# EAGLE board LaserScanner-Panel (EAGLE 9.1.3)
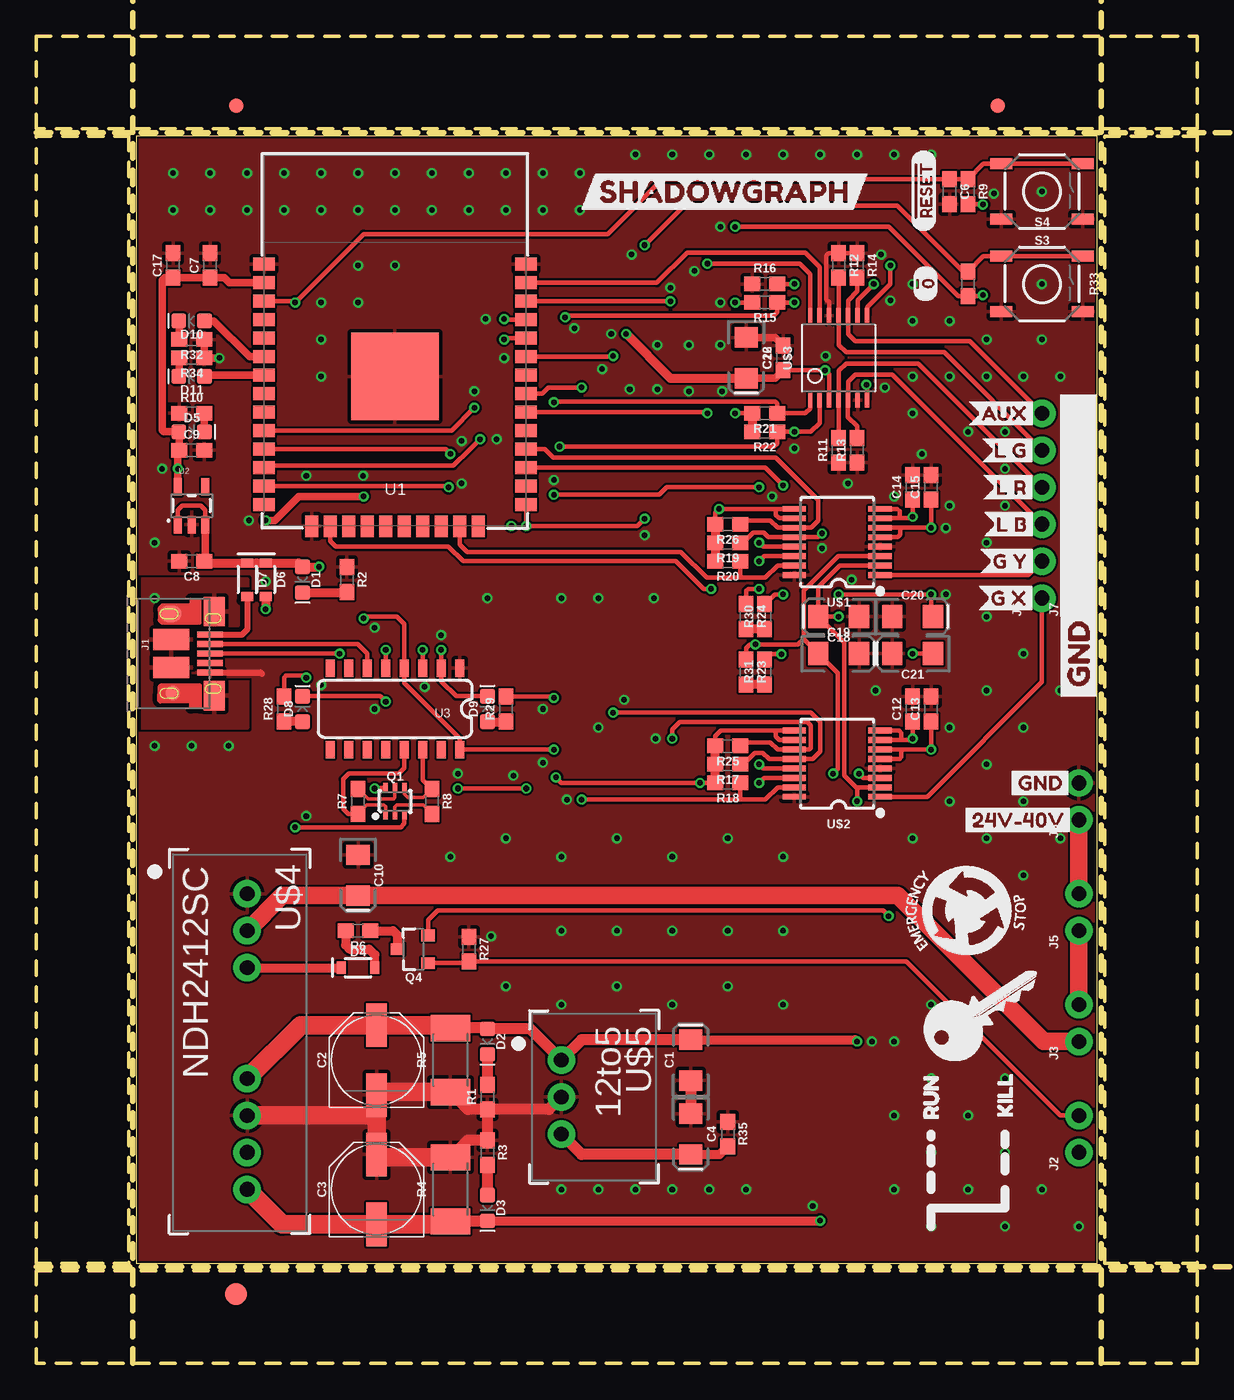
[diagram p0: board, top side]
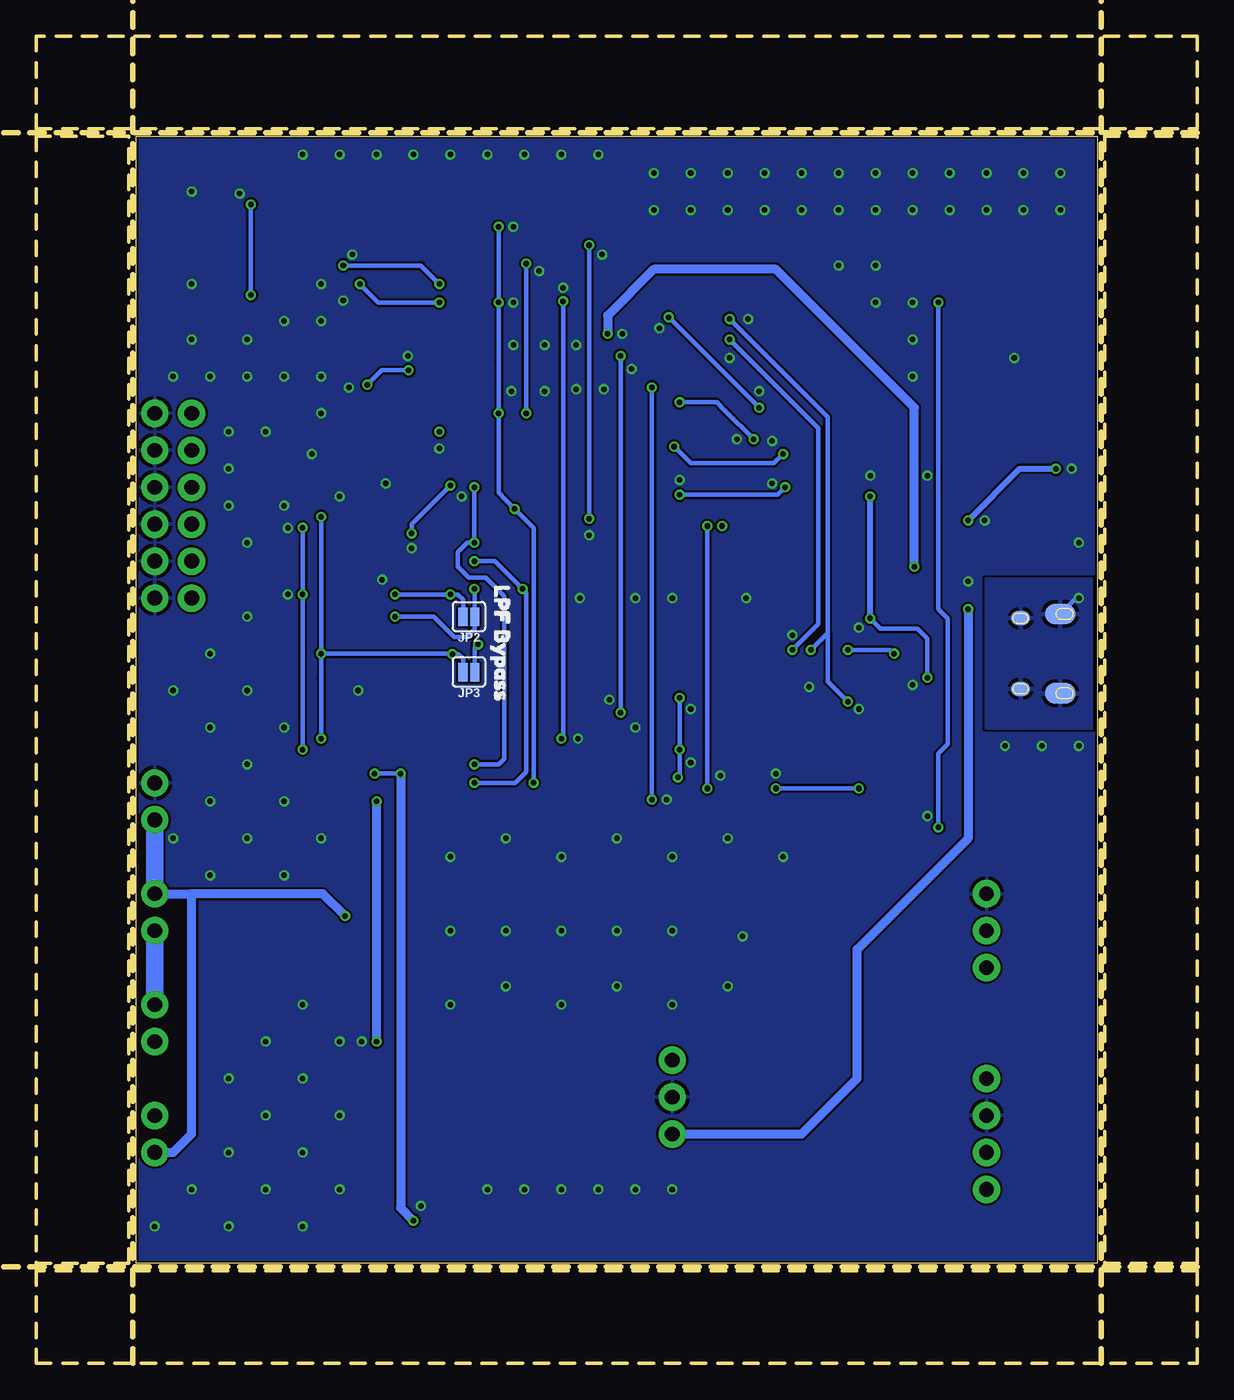
[diagram p1: board, bottom side, seen from below]

Size 79.76 x 91.19 mm. Coordinates in mm from the lower left corner, seen from the top.
Outline: 6.86,6.86 72.88,6.86 72.9,84.33 6.86,84.33 6.86,6.86
Outline: 0,6.35 79.76,6.35 79.76,0 0,0 0,6.35
Outline: 73.41,84.33 79.76,84.33 79.76,6.86 73.41,6.86 73.41,84.33
Outline: 0,91.19 79.76,91.19 79.76,84.84 0,84.84 0,91.19
Outline: 0,84.33 6.35,84.33 6.35,6.86 0,6.86 0,84.33
Copper layers (1*16): Top 0.035mm / dielectric 1.5mm / Bottom 0.035mm
Design rules "SparkFun-2-layer-PCBWay-LIMIT": minimum track width 6mil, minimum drill 0.3mm, track to track 6mil, track to pad 6mil, pad to pad 6mil, via to via 6mil, smd to smd 6mil, copper to edge 6mil, drill to drill 6mil, minimum pad ring 6mil, minimum via ring 6mil, stop-mask expansion 4mil, vias tented up to drill 25mil, thermal gap 10mil
Milling: 206 lines

## Footprints (pad centres in the part's own frame; a part is rotated, then mirrored left to right if it is on the bottom)
EIA3216 = smd 1.4 x 1.6: + 1.4,0; - -1.4,0
PANASONIC_D = smd 3 x 1.4: + 2.4,0; - -2.4,0
0603 = smd 1.1 x 1: 1 -0.85,0; 2 0.85,0
LED-0603 = smd 1 x 1: A -0.877,0; C 0.877,0
SOD-323 = smd 0.63 x 0.83: A 1.15,0; C -1.15,0
FIDUCIAL-1X2 = smd 1 x 1: 1 0,0
FIDUCIAL-1.5X3 = smd 1.5 x 1.5: 1 0,0
USB-MICROB-PTH-MILL = smd 0.4 x 1.75: D+ 0,0; D- -0.65,0; GND 1.3,0; ID 0.65,0; VBUS -1.3,0 | smd 2 x 1.46: SHIELD -2.9,0.275; SHIELD2 2.9,0.275 | smd 1.425 x 2.5: SHIELD3 -0.963,-2.675; SHIELD4 0.963,-2.675 | smd 1.4 x 2.1 bottom: SHIELD5 -2.731,-2.531; SHIELD7 2.729,-2.531 | smd 1 x 1: SHIELD6 2.7,-2.575 | smd 1.1 x 1.5: SHIELD8 -2.731,-2.731 | smd 1 x 1.3 bottom: SHIELD9 -2.43,0.195; SHIELD10 2.43,0.195
1X02_NO_SILK = drill 1.016 pad 1.88: 1 0,0; 2 2.54,0
1X06_NO_SILK = drill 1.016 pad 1.88: 1 0,0; 2 2.54,0; 3 5.08,0; 4 7.62,0; 5 10.16,0; 6 12.7,0
SMT-JUMPER_2_NO_SILK = smd 0.635 x 1.27: 1 -0.406,0; 2 0.406,0
SC70-6 = smd 0.3 x 0.66: 1 -0.65,-0.92; 2 0,-0.92; 3 0.65,-0.92; 4 0.65,0.92; 5 0,0.92; 6 -0.65,0.92
SOT23-3 = smd 0.8 x 0.9: 1 -0.95,-1; 2 0.95,-1; 3 0,1.1
2010 = smd 1.8 x 2.7: 1 -2.2,0; 2 2.2,0
TACTILE_SWITCH_SMD_5.2MM = smd 1.524 x 0.762: 1 -2.794,1.905; 2 2.794,1.905; 3 -2.794,-1.905; 4 2.794,-1.905
ESP-WROOM-32 = smd 0.9 x 1.5: 1 7.7,9; 2 6.43,9; 3 5.16,9; 4 3.89,9; 5 2.62,9; 6 1.35,9; 7 0.08,9; 8 -1.19,9; 9 -2.46,9; 10 -3.73,9; 11 -5,9; 12 -6.27,9; 13 -7.54,9; 14 -8.81,9; 25 -8.81,-9; 26 -7.54,-9; 27 -6.27,-9; 28 -5,-9; 29 -3.73,-9; 30 -2.46,-9; 31 -1.19,-9; 32 0.08,-9; 33 1.35,-9; 34 2.62,-9; 35 3.89,-9; 36 5.16,-9; 37 6.43,-9; 38 7.7,-9 | smd 1.5 x 0.9: 15 -10.3,5.715; 16 -10.3,4.445; 17 -10.3,3.175; 18 -10.3,1.905; 19 -10.3,0.635; 20 -10.3,-0.635; 21 -10.3,-1.905; 22 -10.3,-3.175; 23 -10.3,-4.445; 24 -10.3,-5.715 | smd 6 x 6: GND 0,0
SOT23-5 = smd 0.55 x 1.2: 1 -0.95,-1.3; 2 0,-1.3; 3 0.95,-1.3; 4 0.95,1.3; 5 -0.95,1.3
SO016 = smd 0.6 x 1.2: 1 -4.445,-2.8; 2 -3.175,-2.8; 3 -1.905,-2.8; 4 -0.635,-2.8; 5 0.635,-2.8; 6 1.905,-2.8; 7 3.175,-2.8; 8 4.445,-2.8; 9 4.445,2.8; 10 3.175,2.8; 11 1.905,2.8; 12 0.635,2.8; 13 -0.635,2.8; 14 -1.905,2.8; 15 -3.175,2.8; 16 -4.445,2.8
TSSOP16 = smd 0.4 x 1.6: 1 -2.225,-2.85; 2 -1.575,-2.85; 3 -0.925,-2.85; 4 -0.275,-2.85; 5 0.375,-2.85; 6 1.025,-2.85; 7 1.675,-2.85; 8 2.325,-2.85; 9 2.325,3.05; 10 1.675,3.05; 11 1.025,3.05; 12 0.375,3.05; 13 -0.275,3.05; 14 -0.925,3.05; 15 -1.575,3.05; 16 -2.225,3.05
TSSOP14 = smd 0.305 x 0.991: 1 -1.95,-2.918; 2 -1.3,-2.918; 3 -0.65,-2.918; 4 0,-2.918; 5 0.65,-2.918; 6 1.3,-2.918; 7 1.95,-2.918; 8 1.95,2.918; 9 1.3,2.918; 10 0.65,2.918; 11 0,2.918; 12 -0.65,2.918; 13 -1.3,2.918; 14 -1.95,2.918
NDH = drill 1.016 pad 1.88: 1 0,0; 2 2.54,0; 3 5.08,0; 6 12.7,0; 7 15.24,0; 8 17.78,0; 9 20.32,0
RE-78E = drill 1.016 pad 1.88: 1 0,0; 2 2.54,0; 3 5.08,0

## Placement (x,y rotation side)
C1  10uF  [EIA3216]  44.96,20.83 90 top
C2  [PANASONIC_D]  23.37,20.83 90 top
C3  [PANASONIC_D]  23.37,11.94 90 top
C4  10uF  [EIA3216]  44.96,15.75 270 top
C6  0.1uF  [0603]  62.74,80.52 270 top
C7  0.1uF  [0603]  11.94,75.44 90 top
C8  1.0uF  [0603]  10.67,55.12 180 top
C9  1.0uF  [0603]  10.67,62.74 0 top
C10  10uF  [EIA3216]  22.1,33.53 270 top
C12  1.0uF  [0603]  60.2,44.96 90 top
C13  1.0uF  [0603]  61.47,44.96 90 top
C14  1.0uF  [0603]  60.2,60.2 90 top
C15  1.0uF  [0603]  61.47,60.2 90 top
C16  1.0uF  [0603]  51.31,69.09 90 top
C17  1.0uF  [0603]  9.4,75.44 90 top
C18  10uF  [EIA3216]  55.12,51.31 180 top
C19  10uF  [EIA3216]  55.12,48.77 0 top
C20  10uF  [EIA3216]  60.2,51.31 0 top
C21  10uF  [EIA3216]  60.2,48.77 180 top
C22  10uF  [EIA3216]  48.77,69.09 270 top
D1  RED  [LED-0603]  18.29,53.85 270 top
D2  BLUE  [LED-0603]  30.99,22.1 270 top
D3  BLUE  [LED-0603]  30.99,10.67 270 top
D4  3A/10V/280mV  [SOD-323]  22.1,27.18 0 top
D5  RED  [LED-0603]  10.67,64.01 0 top
D6  3A/10V/280mV  [SOD-323]  15.75,53.85 270 top
D7  3A/10V/280mV  [SOD-323]  14.48,53.85 270 top
D8  GREEN  [LED-0603]  18.29,44.96 90 top
D9  Yellow  [LED-0603]  30.99,44.96 90 top
D10  BLUE  [LED-0603]  10.67,71.63 180 top
D11  BLUE  [LED-0603]  10.67,67.82 180 top
E$1  [FIDUCIAL-1X2]  13.72,86.42 0 top
E$2  [FIDUCIAL-1X2]  66.04,86.42 0 top
E$3  [FIDUCIAL-1.5X3]  13.72,4.76 0 top
J1  USB  [USB-MICROB-PTH-MILL]  11.94,48.77 270 top
J2  !KILL!  [1X02_NO_SILK]  71.63,14.48 90 top
J3  KEYSWITCH  [1X02_NO_SILK]  71.63,22.1 90 top
J5  ESTOP  [1X02_NO_SILK]  71.63,29.72 90 top
J6  [1X06_NO_SILK]  69.09,52.58 90 top
J7  [1X06_NO_SILK]  71.63,52.58 90 top
J8  Power Input  [1X02_NO_SILK]  71.63,37.34 90 top
JP2  JUMPER-SMT_2_NO_SILK  [SMT-JUMPER_2_NO_SILK]  50.04,51.31 180 bottom
JP3  JUMPER-SMT_2_NO_SILK  [SMT-JUMPER_2_NO_SILK]  50.04,47.5 180 bottom
Q1  MBT3904DW1T1  [SC70-6]  24.64,38.61 0 top
Q4  2.5A/30V/105mΩ  [SOT23-3]  25.91,28.45 90 top
R1  1k  [0603]  30.99,18.29 90 top
R2  1k  [0603]  21.34,53.85 270 top
R3  1k  [0603]  30.99,14.48 270 top
R4  510  [2010]  28.45,11.94 90 top
R5  510  [2010]  28.45,20.83 90 top
R6  3.3k  [0603]  22.1,29.72 180 top
R7  10k  [0603]  22.1,38.61 90 top
R8  10k  [0603]  27.18,38.61 270 top
R9  10k  [0603]  64.01,80.52 270 top
R10  1k  [0603]  10.67,65.28 0 top
R11  10k  [0603]  55.12,62.74 90 top
R12  10k  [0603]  55.12,75.44 270 top
R13  10k  [0603]  56.39,62.74 90 top
R14  10k  [0603]  56.39,75.44 270 top
R15  10k  [0603]  50.04,72.9 180 top
R16  10k  [0603]  50.04,74.17 0 top
R17  10k  [0603]  47.5,41.15 180 top
R18  10k  [0603]  47.5,39.88 180 top
R19  10k  [0603]  47.5,56.39 180 top
R20  10k  [0603]  47.5,55.12 180 top
R21  10k  [0603]  50.04,65.28 180 top
R22  10k  [0603]  50.04,64.01 180 top
R23  10k  [0603]  48.77,47.5 270 top
R24  10k  [0603]  48.77,51.31 270 top
R25  10k  [0603]  47.5,42.42 180 top
R26  10k  [0603]  47.5,57.66 180 top
R27  10k  [0603]  29.72,28.45 270 top
R28  1k  [0603]  17.02,44.96 90 top
R29  1k  [0603]  32.26,44.96 90 top
R30  10k  [0603]  50.04,51.31 90 top
R31  10k  [0603]  50.04,47.5 90 top
R32  1k  [0603]  10.67,70.36 180 top
R33  10k  [0603]  64.01,74.17 270 top
R34  1k  [0603]  10.67,69.09 180 top
R35  100  [0603]  47.5,15.75 270 top
S3  USW2  [TACTILE_SWITCH_SMD_5.2MM]  69.09,74.17 0 top
S4  USW3  [TACTILE_SWITCH_SMD_5.2MM]  69.09,80.52 0 top
U1  ESP-WROOM-32  [ESP-WROOM-32]  24.64,67.82 90 top
U2  3.3V  [SOT23-5]  10.67,58.93 0 top
U3  CH340C  [SO016]  24.64,44.96 180 top
U$1  DAC8871SBPW  [TSSOP16]  55.12,56.39 90 top
U$2  DAC8871SBPW  [TSSOP16]  55.12,41.15 90 top
U$3  DAC80004IPW  [TSSOP14]  55.12,69.09 0 top
U$4  NDH2412SC  [NDH]  14.48,32.26 270 top
U$5  12to5  [RE-78E]  36.07,20.83 270 top
U$6  [KEY#PNG]  64.86,23.86 0 top
U$7  [E#STOP#JPG]  63.86,30.86 90 top
U$8  [24V#40V3]  63.37,37.34 0 top
U$9  [GND0]  71.6,45.11 90 top
U$10  [GND1]  66.55,39.88 0 top
U$11  [KILL11]  66.55,16 90 top
U$12  [RUN10]  61.47,15.88 90 top
U$13  [#RESET14]  60.96,77.6 90 top
U$14  [#013]  61.09,72.77 90 top
U$15  [AUX4]  64.01,65.28 0 top
U$16  [G_X14]  64.64,52.58 0 top
U$17  [G_Y13]  64.77,55.12 0 top
U$18  [L_B12]  65.02,57.66 0 top
U$19  [LPF_BYPASS12]  47.75,54.36 270 bottom
U$20  [L_R14]  65.02,60.2 0 top
U$21  [L_G10]  64.9,62.74 0 top
U$22  [SHADOWGRAPH15]  37.34,80.52 0 top

## Library data of the parts
C1 C4 C10 C18-C22 = SparkFun-Capacitors; PROD_ID: CAP-00811
C2 C3 = SparkFun-Capacitors
C6 = SparkFun-Capacitors; PROD_ID: CAP-00810
C7 = SparkFun-Capacitors; PROD_ID: CAP-08604
C8 C9 = SparkFun-Capacitors; PROD_ID: CAP-00868
C12-C17 = SparkFun-Capacitors; PROD_ID: CAP-13930
D1 D5 = SparkFun-LED; PROD_ID: DIO-00819
D2 D3 D10 D11 = SparkFun-LED; PROD_ID: DIO-08575
D4 D6 D7 = SparkFun-DiscreteSemi; PROD_ID: DIO-14072
D8 = SparkFun-LED; PROD_ID: DIO-00821
D9 = SparkFun-LED; PROD_ID: DIO-09003
E$1 E$2 = SparkFun-Aesthetics
E$3 = SparkFun-Retired
J1 = SparkFun-Connectors; PROD_ID: CONN-13711
J2 J3 J5 J8 = SparkFun-Connectors
J6 J7 = SparkFun-Connectors; PROD_ID: CONN-08437
JP2 JP3 = SparkFun-Jumpers
Q1 = SparkFun-DiscreteSemi; PROD_ID: TRANS-13337
Q4 = SparkFun-DiscreteSemi; PROD_ID: TRANS-11308
R1-R3 R10 R28 R29 R32 R34 = SparkFun-Resistors; PROD_ID: RES-07856
R4 R5 = SparkFun-Resistors; PROD_ID: RES-08717
R6 = SparkFun-Resistors; PROD_ID: RES-07851
R7-R9 R11-R27 R30 R31 R33 = SparkFun-Resistors; PROD_ID: RES-00824
R35 = SparkFun-Resistors; PROD_ID: RES-12438
S3 S4 = SparkFun-Switches; PROD_ID: SWCH-08247; SF_SKU: COM-08720
U1 = SparkFun-RF; PROD_ID: IC-13849
U2 = SparkFun-IC-Power; PROD_ID: VREG-12457
U3 = SparkFun-IC-Comms; PROD_ID: IC-14038
U$1-U$5 = laserscanner
U$6 = key#png
U$7 = e#stop#jpg
U$8-U$22 = buzzard_labels

## Nets
0: Q1.6 R33.1 S3.1 S3.2 U1.25
3.3V: C7.1 C9.1 C17.1 D5.A R9.2 R15.2 R17.2 R18.2 R19.2 R20.2 R21.2 R22.2 R25.2 R26.2 R28.2 R29.2 R33.2 U1.2 U2.5 U3.4 U3.16 U$1.9 U$1.10 U$2.9 U$2.10
5V: C8.1 C16.1 C22.+ D1.A D6.C D7.C U2.1 U2.3 U$3.3 U$3.7
12V: C1.+ C2.+ C18.+ D2.A JP2.1 R5.2 R24.1 U$1.2 U$2.2 U$4.6 U$5.1
!DTR: Q1.1 R7.1 U3.13
!KILL: J2.2 Q4.1 R27.2
!RTS: Q1.4 R8.1 U3.14
-12V: C3.- C19.- D3.C JP3.1 R4.1 R23.1 U$1.3 U$2.3 U$4.9
AUX_OUT: J6.6 R14.2 U$3.10
D+: J1.D+ U3.5
D-: J1.D- U3.6
G_MOSI: U1.16 U$1.14 U$2.14
G_SCLK: U1.13 U$1.13 U$2.13
GND: C1.- C2.- C3.+ C4.- C6.2 C7.2 C8.2 C9.2 C10.- C12.2 C13.2 C14.2 C15.2 C16.2 C17.2 C18.- C19.+ C20.- C21.+ C22.- J1.GND J7.1 J7.2 J7.3 J7.4 J7.5 J7.6 J8.2 R1.1 R2.1 R3.1 R4.2 R5.1 R10.1 R11.1 R12.1 R13.1 R14.1 R16.1 R27.1 R32.1 R34.1 R35.1 S3.3 S3.4 S4.3 S4.4 U1.1 U1.15 U1.38 U1.GND U2.2 U3.1 U$1.4 U$1.16 U$2.4 U$2.16 U$3.6 U$3.12 U$4.1 U$4.7 U$5.2
GX_!CS: R17.1 U1.33 U$2.12
GX_!LDAC: R18.1 U1.31 U$2.15
GX_!RST: R25.1 U1.36 U$2.11
GX_OUT: J6.1 U$2.1
GY_!CS: R19.1 U1.27 U$1.12
GY_!LDAC: R20.1 U1.23 U$1.15
GY_!RST: R26.1 U1.28 U$1.11
GY_OUT: J6.2 U$1.1
L_!CLR: R15.1 U1.10 U$3.9
L_!LDAC: R21.1 U1.12 U$3.1
L_!SYNC: R22.1 U1.11 U$3.2
L_MOSI: U1.37 U$3.13
L_SCLK: U1.30 U$3.14
LASER_B: J6.3 R13.2 U$3.5
LASER_G: J6.5 R12.2 U$3.11
LASER_R: J6.4 R11.2 U$3.4
N$1: D1.C R2.2
N$2: R16.2 U$3.8
N$3: D2.C R1.2
N$4: D4.A R6.2
N$5: D3.A R3.2
N$6: D5.C R10.2
N$7: C4.+ D6.A R35.2 U$5.3
N$8: U1.26
N$9: J3.2 J5.1
N$10: Q1.5 R7.2
N$11: U1.29
N$12: Q1.2 R8.2
N$13: D8.A R28.1
N$14: D9.A R29.1
N$15: R24.2 R30.1
N$16: R23.2 R31.1
N$17: D10.C R32.2
N$18: D11.C R34.2
N$22: U1.8
N$23: U1.9
RESET: C6.1 Q1.3 R9.1 S4.1 S4.2 U1.3
RXI: D9.C U1.34 U3.2
SHIELD: J1.SHIELD J1.SHIELD2 J1.SHIELD3 J1.SHIELD4 J1.SHIELD5 J1.SHIELD6 J1.SHIELD7 J1.SHIELD8 J1.SHIELD9 J1.SHIELD10
SHTDWN: Q4.3 R6.1
SHTDWN_BASE: D4.C U$4.3
TXO: D8.C U1.35 U3.3
ULED1: D10.A U1.6
ULED2: D11.A U1.7
V_USB: D7.A J1.VBUS
VCC: J2.1 J5.2 J8.1 Q4.2
VCC_SWITCHED: C10.+ J3.1 U$4.2
VREFH: C13.1 C15.1 C20.+ JP2.2 R30.2 U$1.5 U$1.6 U$2.5 U$2.6
VREFL: C12.1 C14.1 C21.- JP3.2 R31.2 U$1.7 U$1.8 U$2.7 U$2.8

## Tracks (layer width: path | path; a pad name or v marks a point on that pad's centre or on a via)
0  (via drill 0.38)
  Top 0.305: Q1.6 23.27,39.53 v23.24,39.5 | v28.96,39.5 v33.66,39.5 | U1.25 33.66,58.99 v33.66,57.53 41.27,57.53 v41.78,58.04 | v41.78,76.84 44.5,79.56 59.13,79.56 63.67,75.02 R33.1 65.06,76.07 S3.1 S3.2
  Bottom 0.305: v23.24,39.5 v28.96,39.5 | v33.66,39.5 v33.66,57.53 | v41.78,58.04 v41.78,76.84
3.3V  (via drill 0.38)
  Top 0.305: U$1.9 51.05,58.71 50.8,58.71 | 50.8,58.71 v46.9,58.71 46.65,58.46 R26.2 | U$1.10 51.03,58.06 50.8,58.29 50.8,58.71 | U$2.9 50.8,43.47 | 50.8,43.47 47.03,43.47 46.65,43.09 R25.2 | U$2.10 51.03,42.82 50.8,43.05 50.8,43.47 | 9.72,62.64 C9.1 9.79,62.76 | v65.02,73.41 64.94,73.32 R33.2 63.33,73.32 58.55,78.11 v48.01,78.11 | v65.02,79.63 64.98,79.67 R9.2 | R15.2 v48.01,72.9 | U3.4 25.27,47.62 | 25.27,47.62 25.27,46.74 29.08,42.93 U3.16 v35.55,42.16 v35.56,42.16 | v48.01,65.28 R21.2 | R18.2 v45.59,39.88 36.07,39.88 v35.69,40.26 | v35.56,45.72 35.47,45.81 R29.2 | R28.2 17.02,47.12 17.14,47.24 18.41,47.24 v18.54,47.12 | 25.27,47.62 25.27,50.8 24.77,51.31 22.61,51.31 v22.48,51.18
  Top 0.508: U2.5 v9.72,61.47 9.72,62.64 | C9.1 9.82,63.98 D5.A 8.76,64.01 8.64,64.14 8.64,74.42 8.8,74.59 C17.1 C7.1 12.91,74.59 13.25,74.25 U1.2 | v15.75,57.91 16.38,57.91 18.03,59.56 v22.48,59.56
  Top 0.61: R21.2 R22.2 | R18.2 R17.2 R25.2 | R20.2 R19.2 R26.2
  Bottom 0.305: v65.02,73.41 v65.02,79.63 | v48.01,78.11 48.01,74.04 v48.01,72.9 48.01,68.83 v48.01,65.28 48.01,59.82 47.5,59.31 | 47.5,59.31 v46.9,58.71 | 47.5,59.31 45.59,57.4 v45.59,39.88 | v35.56,45.72 v35.56,42.16 35.56,40.39 v35.69,40.26 | v22.48,51.18 21.78,50.48 19.24,50.48 18.54,49.78 v18.54,47.12
  Bottom 0.406: v22.48,51.18 v22.48,59.56 | v15.75,57.91 12.19,61.47 v9.72,61.47
5V  (via drill 0.38)
  Top 0.305: U$3.3 54.47,67.96 v54.19,68.24 C16.1 | U$3.7 57.07,67.2 v57.02,67.25 | U2.1 9.72,58.61 10.03,58.93 11.3,58.93 11.62,58.61 U2.3 | 18.09,54.92 D1.A
  Top 0.508: C16.1 50.76,67.69 C22.+ | C8.1 11.62,55.22 U2.3
  Top 0.61: C8.1 11.64,55 D7.C 15.11,55 D6.C 18.02,55 D1.A 19.42,54.72 v19.43,54.74 | v40.51,70.74 43.56,67.69 C22.+
  Bottom 0.305: v57.02,67.25 56.03,68.24 v54.19,68.24
  Bottom 0.61: v40.51,70.74 40.51,72.01 37.34,75.18 28.96,75.18 19.43,65.66 v19.43,54.74
12V  (via drill 0.38)
  Top 0.305: U$1.2 55.19,54.81 53.72,53.34 C18.+ | U$2.2 56.39,39.57 | 56.39,39.57 56.31,39.57 55.51,40.37 55.51,49.51 C18.+ | 56.39,39.57 v56.39,38.61 | R24.1 48.77,53.09 48.89,53.21 v49.66,53.21 | v55.12,51.31 C18.+
  Top 0.61: C1.+ 56.26,22.23 v56.39,22.1
  Top 0.762: R5.2 30.94,23.03 D2.A 33.92,22.98 U$5.1 37.47,22.23 C1.+
  Top 1.27: U$4.6 18.15,23.23 C2.+ 28.25,23.23 R5.2
  Bottom 0.305: v49.66,53.21 49.63,53.19 JP2.1 49.63,50.44 50.16,49.91 51.05,49.91 52.45,51.31 v55.12,51.31
  Bottom 0.61: v56.39,22.1 v56.39,38.61
!DTR
  Top 0.254: Q1.1 23.99,38.24 23.88,38.35 22.69,38.35 R7.1
  Top 0.305: U3.13 25.27,40.89 24.89,40.51 21.46,40.51 21.08,40.13 21.08,38.1 21.42,37.76 R7.1
!KILL
  Top 0.305: Q4.1 29.62,27.5 R27.2 59.78,27.6 70.36,17.02 J2.2
!RTS
  Top 0.254: Q1.4 25.29,39.1 25.53,38.86 26.58,38.86 R8.1
  Top 0.305: U3.14 26.54,40.09 R8.1
-12V  (via drill 0.38)
  Top 0.305: 52.7,49.78 52.7,53.09 55.08,55.46 U$1.3 | U$2.3 56.8,40.22 v56.51,40.51 | 52.7,49.78 C19.- 55.06,47.43 55.06,40.83 v54.74,40.51 | R23.1 48.77,49.15 49.01,49.39 v49.4,49.39 52.32,49.39 52.7,49.78
  Top 0.61: D3.C v53.85,9.79
  Top 0.762: R4.1 30.94,9.74 D3.C
  Top 1.27: U$4.9 16.88,9.54 C3.- 28.25,9.54 R4.1
  Bottom 0.305: v56.51,40.51 v54.74,40.51 | JP3.1 49.63,49.16 v49.4,49.39
  Bottom 0.61: v54.74,40.51 54.74,10.68 v53.85,9.79
AUX_OUT
  Top 0.305: R14.2 56.39,73.66 55.77,73.04 U$3.10 55.77,70.72 56.26,70.23 64.14,70.23 J6.6
D+  (via drill 0.38)
  Top 0.305: J1.D+ v20.83,48.77 | v24,49.02 U3.5
  Bottom 0.305: v24,49.02 21.08,49.02 v20.83,48.77
D-
  Top 0.305: J1.D- 22.08,49.42 22.73,48.77 U3.6
G_MOSI  (via drill 0.38)
  Top 0.305: U$1.14 50,55.46 v49.66,55.12 | U$2.14 50,40.22 v49.66,39.88 | U1.16 20.19,56.51 20.57,56.13 28.31,56.13 29.32,55.12 43.94,55.12 45.85,53.21 v46.35,53.21
  Bottom 0.305: v49.66,39.88 46.86,39.88 46.1,40.64 46.1,52.96 v46.35,53.21 48.26,55.12 v49.66,55.12
G_SCLK  (via drill 0.38)
  Top 0.305: U$1.13 49.93,56.11 v49.66,56.39 | U$2.13 49.93,40.87 v49.66,41.15 | v28.32,60.2 28.32,60.28 U1.13 | v35.56,59.69 42.8,59.69 43.31,60.2 v49.66,60.2
  Bottom 0.305: v49.66,60.2 v49.66,56.39 50.16,56.39 50.36,56.2 50.8,55.75 50.8,54.74 50.04,53.97 48.89,53.97 47.62,52.7 47.62,41.53 48.01,41.15 v49.66,41.15 | v35.56,59.69 28.83,59.69 v28.32,60.2
GND  (via drill 0.38)
  Top 0.305: U$3.12 54.47,72.91 54.27,73.11 54.27,76.12 54.44,76.29 R12.1 R14.1
  Top 0.406: J1.GND 15.4,47.47 15.49,47.37
  Top 0.508: C22.- 50.76,70.49 C16.2 | R32.1 R34.1 v12.57,69.09
  Top 0.762: R1.1 R3.1 29.64,15.33 R4.2 | R1.1 29.64,17.44 R5.1 | C1.- C4.- | R1.1 35.22,17.44 U$5.2
  Top 1.27: R4.2 23.57,14.14 C3.+ 23.37,17.02 | 23.37,17.02 C2.- 23.57,18.63 R5.1 | 23.37,17.02 U$4.7
  other vias: 65.79,80.39 58.04,76.2 58.67,73.03 46.99,72.9 46.99,78.11 40.89,76.2 45.21,75.06 43.56,73.91 46.99,69.98 44.83,69.98 42.67,69.98 39.5,70.74 36.96,71.12 38.86,68.33 42.67,66.93 40.77,66.93 44.83,66.8 47.12,66.8 54.23,69.22 30.86,71.76 19.56,72.9 62.48,57.4 58.93,59.56 60.83,62.48 52.07,62.86 58.29,67.06 62.48,52.83 56.01,53.85 41.78,56.9 50.55,59.56 35.56,60.71 30.1,66.8 31.62,63.5 29.21,63.37 29.21,60.45 32.13,69.09 22.45,60.99 18.54,60.99 14.61,57.91 15.75,53.72 8.64,61.47 34.8,44.96 40.39,45.59 42.54,42.93 27.81,50.04 23.24,50.55 26.67,46.48 23.24,44.96 19.56,46.61 18.54,37.59 28.96,40.51 32.77,40.39 34.8,41.27 36.45,38.73 31.24,29.34 57.4,22.1 53.34,10.79 55.75,60.45 60.2,67.82 62.74,67.82 65.28,67.82 66.55,64.01 64.01,64.01 66.55,61.47 60.2,65.28 66.55,58.93 65.28,56.39 62.74,58.93 65.28,51.31 53.97,56.01 67.82,48.77 65.28,46.23 57.66,46.23 70.36,46.23 67.82,43.69 62.74,43.69 65.28,41.15 62.74,38.61 9.4,81.79 9.4,79.25 11.94,79.25 14.48,81.79 11.94,81.79 14.48,79.25 17.02,79.25 17.02,81.79 19.56,81.79 19.56,79.25 22.1,79.25 24.64,79.25 27.18,79.25 22.1,81.79 24.64,81.79 27.18,81.79 29.72,81.79 32.26,81.79 34.8,81.79 37.34,81.79 37.34,79.25 29.72,79.25 32.26,79.25 34.8,79.25 41.15,83.06 43.69,83.06 46.23,83.06 48.77,83.06 51.31,83.06 53.85,83.06 56.39,83.06 58.93,83.06 61.47,83.06 69.09,80.52 69.09,74.17 65.28,70.36 62.74,71.63 60.2,71.63 60.2,74.17 70.36,67.82 67.82,67.82 69.09,70.36 36.07,52.58 42.42,52.58 38.61,52.58 30.99,52.58 38.61,43.69 28.45,34.8 32.26,36.07 36.07,34.8 39.88,36.07 43.69,34.8 47.5,36.07 36.07,11.94 38.61,11.94 41.15,11.94 43.69,11.94 46.23,11.94 48.77,11.94 61.47,24.64 64.01,22.1 66.55,19.56 61.47,19.56 58.93,22.1 58.93,17.02 64.01,17.02 66.55,14.48 61.47,14.48 58.93,11.94 64.01,11.94 69.09,11.94 61.47,9.4 66.55,9.4 71.63,9.4 8.13,42.42 10.67,42.42 13.21,42.42 8.13,56.39 32.26,25.91 36.07,24.64 39.88,25.91 43.69,24.64 47.5,25.91 51.31,24.64 36.07,29.72 39.88,29.72 43.69,29.72 47.5,29.72 51.31,29.72 67.82,38.61 70.36,36.07 60.2,36.07 65.28,36.07 62.74,33.53 67.82,33.53 51.31,34.8 22.1,75.44 24.64,75.44 22.1,72.9 19.56,70.36 19.56,67.82
  pour Top (isolate 0.152, rank 3): 6.86,6.86 6.86,84.33 72.9,84.33 72.9,6.86
  pour Bottom (isolate 0.152, rank 3): 6.86,6.86 72.9,6.86 72.9,84.33 6.86,84.33
GX_!CS  (via drill 0.38)
  Top 0.305: R17.1 48.56,41.15 49.36,41.95 49.91,41.95 50.34,41.52 U$2.12 53.33,41.52 53.85,42.04 53.85,44.07 53.21,44.7 v39.62,44.7 | U1.33 39.58,69.17 v39.62,69.22
  Bottom 0.305: v39.62,69.22 v39.62,44.7
GX_!LDAC  (via drill 0.38)
  Top 0.305: U$2.15 50.93,39.57 50.09,38.73 48.39,38.73 | R18.1 48.35,38.77 48.39,38.73 | U1.31 34.75,66.63 35.18,67.06 v37.46,67.06 | v37.46,38.73 48.39,38.73
  Bottom 0.305: v37.46,67.06 v37.46,38.73
GX_!RST  (via drill 0.38)
  Top 0.305: R25.1 48.6,42.67 50.42,42.67 50.92,42.17 U$2.11 53.09,42.17 53.21,42.29 53.21,43.81 52.96,44.07 44.2,44.07 43.69,43.56 v43.69,42.93 | U1.36 v43.56,72.98
  Bottom 0.305: v43.69,42.93 43.55,43.07 43.55,72.97 v43.56,72.98
GX_OUT
  Top 0.305: U$2.1 61.21,38.92 69.09,46.8 J6.1
GY_!CS  (via drill 0.38)
  Top 0.305: R19.1 48.37,56.41 48.58,56.41 49.26,57.09 49.97,57.09 50.29,56.76 U$1.12 53.71,56.76 v53.97,57.02 | v51.31,60.32 50.08,61.55 U1.27
  Bottom 0.305: v51.31,60.32 53.97,57.66 v53.97,57.02
GY_!LDAC
  Top 0.305: U$1.15 50.93,54.81 50.09,53.97 48.64,53.97 48.39,53.97 | U1.23 29.08,56.26 29.59,55.75 44.28,55.75 46.06,53.97 48.39,53.97 | R20.1 48.35,54.01 48.39,53.97
GY_!RST
  Top 0.305: R26.1 48.6,57.91 50.42,57.91 50.92,57.41 U$1.11 53.22,57.41 53.72,57.91 53.72,59.31 50.8,62.23 35.51,62.23 34.92,62.82 33.53,62.82 U1.28
GY_OUT
  Top 0.305: J6.2 68.13,54.16 U$1.1
L_!CLR  (via drill 0.38)
  Top 0.305: v52.07,72.9 R15.1 50.89,72.22 50.67,72.01 36.45,72.01 v36.32,71.88 | v57.53,74.17 56.84,73.48 56.84,73.47 56.42,73.04 U$3.9 | U1.10 28.53,64.09 v30.1,65.66
  Bottom 0.305: v52.07,72.9 56.26,72.9 v57.53,74.17 | v36.32,71.88 v30.1,65.66
L_!LDAC  (via drill 0.38)
  Top 0.305: U$3.1 53.17,65.61 52.83,65.28 52.07,65.28 R21.1 50.89,65.95 50.76,66.08 35.6,66.08 v35.56,66.04 | v30.48,63.5 29.78,62.8 28.66,61.67 15.77,61.67 U1.12
  Bottom 0.305: v30.48,63.5 32.45,65.47 33.02,66.04 v35.56,66.04
L_!SYNC  (via drill 0.38)
  Top 0.305: U$3.2 53.82,64.61 53.21,64.01 v52.07,64.01 R22.1 50.89,63.21 50.67,62.99 v35.94,62.99 | U1.11 28.11,62.82 v28.45,62.48
  Bottom 0.305: v28.45,62.48 29.08,61.85 34.8,61.85 v35.94,62.99
L_MOSI
  Top 0.305: U$3.13 53.82,75.34 52.83,76.33 50.67,76.33 44.7,76.33 42.62,74.25 U1.37
L_SCLK  (via drill 0.38)
  Top 0.305: U$3.14 53.17,74.85 52.45,75.56 v46.1,75.56 | U1.30 46.02,65.36 v46.1,65.28
  Bottom 0.305: v46.1,65.28 v46.1,75.56
LASER_B
  Top 0.305: R13.2 56.39,64.39 55.75,65.02 55.75,66.16 U$3.5 55.77,67.45 56.26,67.95 58.8,67.95 J6.3
LASER_G
  Top 0.305: R12.2 U$3.11 55.12,69.98 55.63,69.47 62.36,69.47 J6.5
LASER_R
  Top 0.305: R11.2 U$3.4 55.12,68.2 55.63,68.71 60.58,68.71 J6.4
N$1
  Top 0.61: D1.C 21.31,52.97 R2.2
N$2  (via drill 0.38)
  Top 0.305: U$3.8 57.07,72.56 58.67,74.17 v58.67,75.44 | v52.07,74.17 R16.2
  Bottom 0.305: v58.67,75.44 53.34,75.44 v52.07,74.17
N$3
  Top 0.762: D2.C R1.2
N$4
  Top 0.61: D4.A 23.25,28.06 22.86,28.45 21.54,28.45 21.25,28.74 R6.2
N$5
  Top 0.762: R3.2 D3.A
N$6
  Top 0.305: 11.54,65.25 R10.2
  Top 0.508: D5.C 11.54,65.25
N$7  (via drill 0.38)
  Top 0.61: D6.A v15.75,51.82 | C4.+ 46.95,14.35 R35.2
  Top 0.762: U$5.3 37.47,14.35 C4.+
  Bottom 0.61: v15.75,51.82 15.75,36.07 23.37,28.45 23.37,19.56 27.18,15.75 U$5.3
N$9
  Top 1.219: J5.1 J3.2
  Bottom 1.219: J5.1 J3.2
N$10
  Top 0.254: R7.2 22.8,38.76 24.54,38.76 24.64,38.86 Q1.5
N$12
  Top 0.254: Q1.2 24.64,38.23 24.77,38.35 26.58,38.35 R8.2
N$13
  Top 0.61: D8.A 18.26,44.11 R28.1
N$14
  Top 0.61: D9.A 32.23,44.08 R29.1
N$15
  Top 0.61: R30.1 R24.2
N$16
  Top 0.61: R31.1 R23.2
N$17
  Top 0.508: R32.2 9.82,71.6 D10.C
N$18
  Top 0.508: R34.2 9.82,67.84 D11.C
N$38  (via drill 0.38)
  other vias: 32.64,57.53
RESET  (via drill 0.38)
  Top 0.305: Q1.3 25.29,37.1 25.02,36.83 v17.78,36.83 | U1.3 17.7,72.98 v17.78,72.9 22.48,77.6 39.24,77.6 43.01,81.37 62.99,81.37 | S4.2 66.55,82.42 | 66.55,82.42 S4.1 | C6.1 62.99,81.37 | 62.99,81.37 R9.1 65.06,82.42 66.55,82.42
  Bottom 0.305: v17.78,36.83 17.78,41.91 17.14,42.54 17.14,51.18 17.78,51.82 v17.78,72.9
RXI  (via drill 0.38)
  Top 0.305: v27.81,49.02 U3.2 27.81,46.86 28.84,45.83 D9.C | v32.13,70.36 32.21,70.44 U1.34
  Bottom 0.305: v32.13,70.36 26.04,64.26 26.04,50.8 v27.81,49.02
SHIELD  (via drill 0.38)
  Bottom 0.305: J1.SHIELD5 8.33,52.58 v8.13,52.58
  pour Top (isolate 0.305, rank 2): 6.86,53.85 14.48,53.85 14.48,43.69 6.86,43.69
  pour Bottom (isolate 0.305, rank 2): 6.86,53.85 14.48,53.85 14.48,43.69 6.86,43.69
SHTDWN
  Top 0.61: R6.1 24.51,29.72 24.81,29.42 Q4.3
SHTDWN_BASE
  Top 0.61: U$4.3 D4.C
TXO  (via drill 0.38)
  Top 0.305: U3.3 v26.54,49.02 | v32.13,71.76 32.18,71.71 U1.35 | v24,45.47 23.63,45.83 D8.C
  Bottom 0.305: 25.4,50.16 25.4,65.02 v32.13,71.76 | v26.54,49.02 25.4,50.16 | 25.4,50.16 25.4,46.86 v24,45.47
ULED1
  Top 0.508: D10.A 12.19,71.63 14.65,69.17 U1.6
ULED2
  Top 0.508: U1.7 11.62,67.9 D11.A
V_USB
  Top 0.406: J1.VBUS 14.13,50.07 14.48,50.42 D7.A
VCC  (via drill 0.38)
  Top 0.305: Q4.2 26.91,30.46 27.56,31.12 58.17,31.12 v58.55,30.73
  Top 1.219: J8.1 J5.2
  Bottom 0.61: J2.1 70.36,14.48 69.09,15.75 69.09,32.26 | v58.55,30.73 60.07,32.26 69.09,32.26 | J5.2 69.09,32.26
  Bottom 1.219: J5.2 J8.1
VCC_SWITCHED
  Top 1.219: J3.1 69.22,22.1 59.18,32.13 C10.+ 16.89,32.13 U$4.2
VREFH  (via drill 0.38)
  Top 0.305: 59.44,42.17 U$2.6 | 59.44,42.17 v61.47,42.17 C13.1 | 59.36,57.41 U$1.6 | U$1.5 59.18,56.76 59.36,56.94 59.36,57.41 | C15.1 v61.47,57.41 59.36,57.41 | U$2.5 59.3,41.52 59.44,41.66 59.44,42.17 | C20.+ 61.47,51.44 v61.47,52.83 v55.12,52.83 | R30.2 50.71,52.83 v51.31,52.83
  Bottom 0.305: v61.47,57.41 v61.47,52.83 v61.47,42.17 | v55.12,52.83 v51.31,52.83 50.8,52.83 50.44,52.48 JP2.2
VREFL  (via drill 0.38)
  Top 0.305: 59.31,58.06 U$1.7 | 59.31,58.06 60.09,58.06 v60.2,58.17 C14.1 | U$1.8 59.14,58.71 59.31,58.55 59.31,58.06 | 59.44,42.82 U$2.7 | 59.44,42.82 60.09,42.82 v60.2,42.93 C12.1 | U$2.8 59.27,43.47 59.44,43.31 59.44,42.82 | C21.- 61.47,48.64 61.34,48.77 v60.2,48.77 | v51.18,48.73 50.42,48.73 R31.2
  Bottom 0.305: v60.2,58.17 v60.2,48.77 | v60.2,48.77 60.2,47.12 v60.2,42.93 | v60.2,48.77 51.22,48.77 v51.18,48.73 50.76,48.73 50.44,48.41 JP3.2

## Text on the board
Milling: v-score | v-score | v-score | v-score